# EAGLE board heartrate_v1 (EAGLE 7.2.0)
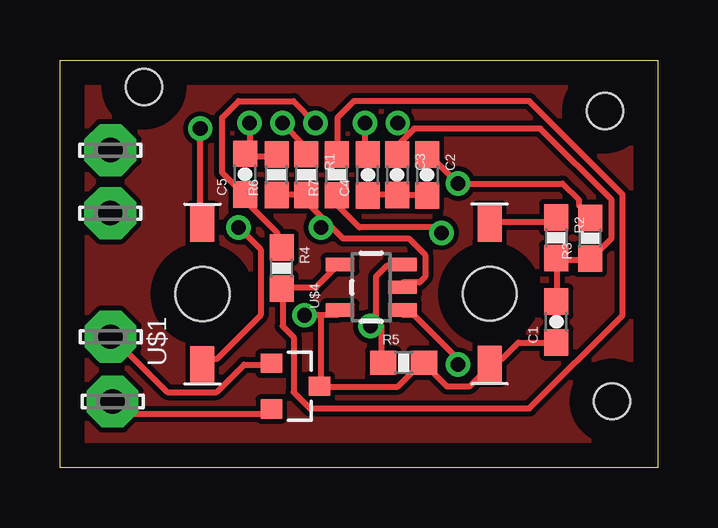
[diagram p0: board, top side]
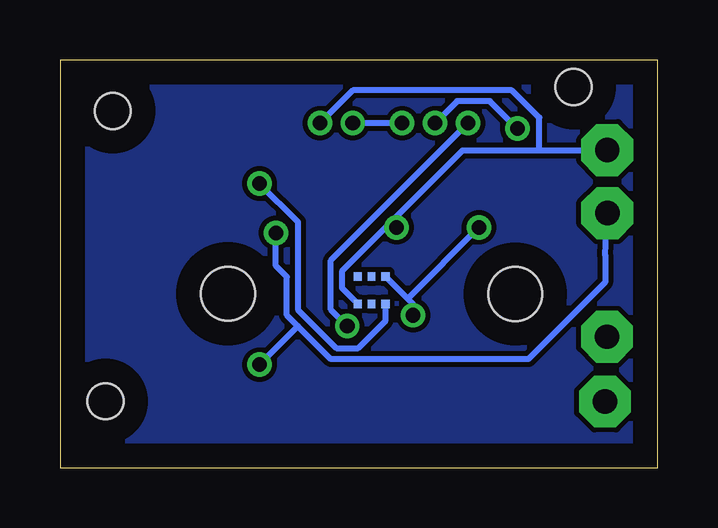
[diagram p1: board, bottom side, seen from below]

Size 24.9 x 16.99 mm. Coordinates in mm from the lower left corner, seen from the top.
Outline: 0,0 0,16.99 24.9,16.99 24.9,0 0,0
Copper layers (1*16): Top 0.035mm / dielectric 1.5mm / Bottom 0.035mm
Design rules "default": minimum track width 10mil, minimum drill 24mil, track to track 8mil, track to pad 8mil, pad to pad 8mil, via to via 8mil, smd to smd 8mil, copper to edge 40mil, drill to drill 8mil, minimum pad ring 10mil, minimum via ring 8mil, stop-mask expansion 4mil, vias tented up to drill 0mil, thermal gap 10mil
Holes 1.5 mm at 3.5,15.87 22.7,14.87 23,2.77

## Footprints (pad centres in the part's own frame; a part is rotated, then mirrored left to right if it is on the bottom)
LSP10 = drill 1.016 pad 2.159 octagon: MP 0,0
0603-CAP = smd 1.1 x 1: 1 -0.85,0; 2 0.85,0
0603-RES = smd 1.1 x 1: 1 -0.85,0; 2 0.85,0
DSAH3717 = smd 1.5 x 1: G 2.925,0; V -2.925,0 | hole 2.25: 0,0
APDS-9008 = smd 0.35 x 0.35: GND -0.575,-0.575; OUT 0.575,-0.575; P$6 -0.575,0.575; VCC 0.575,0.575 | smd 0.3 x 0.35: P$1 0,0.575; P$2 0,-0.575
SOT23-5 = smd 0.55 x 1.2: VDD -0.95,1.3; VIN+ 0.95,-1.3; VIN- 0.95,1.3; VOUT -0.95,-1.3; VSS 0,-1.3
SOT23-3 = smd 0.8 x 0.9: 1 -0.95,-1; 2 0.95,-1; 3 0,1

## Placement (x,y rotation side)
!ENABLE  LSP10  [LSP10]  2.1,5.46 0 top
C1  2.2uF  [0603-CAP]  20.68,6.08 90 top
C2  4.7 uF  [0603-CAP]  15.3,12.2 270 top
C3  4.7 uF  [0603-CAP]  14.05,12.21 270 top
C4  4.7 uF  [0603-CAP]  12.83,12.2 90 top
C5  2.2 uF  [0603-CAP]  7.71,12.23 90 top
GND  LSP10  [LSP10]  2.1,13.23 0 top
OUT  LSP10  [LSP10]  2.09,10.61 0 top
R1  715  [0603-RES]  10.27,12.21 270 top
R2  715  [0603-RES]  20.67,9.58 270 top
R3  12k  [0603-RES]  22.09,9.56 90 top
R4  10k  [0603-RES]  9.23,8.32 270 top
R5  100k  [0603-RES]  14.32,4.38 0 top
R6  100k  [0603-RES]  9.03,12.21 90 top
R7  3.3M  [0603-RES]  11.54,12.21 90 top
U$1  DSAH3717  [DSAH3717]  5.93,7.24 90 top
U$2  DSAH3717  [DSAH3717]  17.9,7.25 90 top
U$3  APDS-9008  [APDS-9008]  11.92,7.4 0 bottom
U$4  MCP6001  [SOT23-5]  12.97,7.52 90 top
U$5  P-CHANNEL-MOSFET  [SOT23-3]  9.81,3.4 270 top
VDD  LSP10  [LSP10]  2.19,2.76 0 top

## Library data of the parts
!ENABLE GND OUT VDD = solpad
C1 R1-R7 = SparkFun-Passives
C2-C5 = SparkFun-Capacitors
U$1-U$4 = MedStatCustom
U$5 = GeekAmmo

## Nets
GND-ISO: C1.2 C3.1 GND.MP R1.2 R2.2 R3.1 R6.1 U$3.GND U$4.VSS
N$1: R1.1 U$1.G
N$2: U$5.2 VDD.MP
N$3: !ENABLE.MP U$5.1
N$4: R2.1 U$2.G
N$5: C2.1 R3.2 U$3.OUT
N$6: C2.2 C3.2 C4.1
N$7: C4.2 C5.1 R4.1
N$10: C5.2 R5.1 R6.2 U$4.VIN+
N$12: R4.2 R7.2 U$4.VIN-
OUT: OUT.MP R7.1 U$4.VOUT
VDD: C1.1 R5.2 U$1.V U$2.V U$3.VCC U$4.VDD U$5.3

## Tracks (layer width: path | path; a pad name or v marks a point on that pad's centre or on a via)
GND
  pour Bottom: 2.6,-0.53 25.2,-0.33 25.4,17.27 -0.2,17.57 -0.7,-0.33
  pour Top: -0.2,17.57 -0.5,17.57 -0.5,-0.93 25.4,-0.93 25.4,17.57 -0.1,17.57
GND-ISO  (via drill 0.61)
  Top 0.254: 20.7,8.64 22.07,8.64 R3.1 22.3,8.87 22.99,9.56 22.99,11.16 20.02,14.13 14.76,14.13 14.53,13.9 | 20.7,8.64 20.7,7.04 C1.2 | 20.7,8.64 R2.2 | 14.53,13.9 14.07,13.44 14.07,13.21 C3.1 | R6.1 9.04,11.39 10.19,11.39 R1.2 10.19,11.16 11.1,10.24 | 11.1,10.24 11.79,9.56 14.53,9.56 15.22,8.87 15.22,7.96 14.99,7.73 14.3,7.73 U$4.VSS | v10.87,10.01 11.1,10.24 | v14.07,14.36 14.53,13.9
  Bottom 0.254: 11.1,10.24 8.13,13.21 4.93,13.21 | 11.1,10.24 13.16,8.19 13.16,7.5 12.47,6.81 U$3.GND | 4.93,13.21 2.19,13.21 GND.MP | 11.1,10.24 v10.87,10.01 | v14.07,14.36 12.7,15.73 6.07,15.73 4.93,14.59 4.93,13.21
N$1  (via drill 0.61)
  Top 0.254: v9.27,14.36 10.19,13.44 10.19,13.21 R1.1 | v5.84,14.13 5.84,10.24 U$1.G
  Bottom 0.254: v9.27,14.36 8.36,15.27 6.99,15.27 v5.84,14.13
N$2
  Top 0.254: U$5.2 8.59,2.24 2.42,2.24 VDD.MP
N$3
  Top 0.254: U$5.1 8.59,4.3 7.67,4.3 6.53,3.16 4.47,3.16 2.19,5.44 !ENABLE.MP
N$4
  Top 0.254: R2.1 20.47,10.24 17.96,10.24 U$2.G
N$5  (via drill 0.61)
  Top 0.254: C2.1 15.45,12.99 v16.59,11.84 20.93,11.84 21.62,11.16 21.62,10.93 22.07,10.47 R3.2
  Bottom 0.254: v16.59,11.84 14.99,10.24 14.99,6.58 13.39,4.99 12.47,4.99 11.33,6.13 11.33,6.81 U$3.OUT
N$6
  Top 0.254: C4.1 12.93,11.39 13.85,11.39 C3.2 14.07,11.39 15.22,11.39 C2.2
N$7  (via drill 0.61)
  Top 0.254: R4.1 9.04,9.33 9.04,9.78 7.67,11.16 C5.1 7.67,11.39 6.76,12.3 6.76,14.59 7.44,15.27 9.73,15.27 v10.64,14.36 | v12.7,14.36 12.7,13.21 C4.2
  Bottom 0.254: v10.64,14.36 v12.7,14.36
N$10  (via drill 0.61)
  Top 0.254: R6.2 8.81,12.99 7.9,12.99 C5.2 7.9,13.21 v7.9,14.36 | 13.16,6.13 13.39,5.9 13.39,4.53 R5.1 | 13.16,6.13 13.16,7.96 13.62,8.41 14.07,8.41 U$4.VIN+ | 13.16,6.13 v12.93,5.9
  Bottom 0.254: v7.9,14.36 13.62,8.64 13.62,6.58 v12.93,5.9
N$12
  Top 0.254: U$4.VIN- 11.56,8.41 10.64,7.5 9.27,7.5 R4.2 9.27,7.27 9.27,5.9 9.73,5.44 9.73,3.16 10.42,2.47 19.56,2.47 23.45,6.36 23.45,11.39 19.56,15.27 12.24,15.27 11.56,14.59 11.56,13.21 R7.2
OUT  (via drill 0.61)
  Top 0.254: v15.9,9.78 15.67,10.01 12.47,10.01 11.56,10.93 11.56,11.16 R7.1 | v16.59,4.3 16.59,4.53 14.76,6.36 14.3,6.36 U$4.VOUT
  Bottom 0.254: v15.9,9.78 15.9,8.41 15.45,7.96 15.45,6.36 14.99,5.9 | 14.99,5.9 13.62,4.53 5.39,4.53 2.19,7.73 2.19,8.87 OUT.MP | 14.99,5.9 v16.59,4.3
VDD  (via drill 0.61)
  Top 0.254: C1.1 20.47,5.21 19.1,5.21 18.42,4.53 17.96,4.53 U$2.V 17.96,4.3 17.04,3.39 16.13,3.39 15.22,4.3 R5.2 14.99,4.3 14.07,3.39 10.87,3.39 U$5.3 10.87,3.61 10.87,6.36 | 10.87,6.36 11.56,6.36 U$4.VDD | 10.87,6.36 v10.19,6.36 | v7.44,10.01 8.36,9.1 8.36,6.36 6.53,4.53 6.07,4.53 U$1.V
  Bottom 0.254: 10.42,7.04 10.19,6.81 v10.19,6.36 | 10.42,7.04 11.33,7.96 U$3.VCC | 10.42,7.04 v7.44,10.01